# Altium PCB roneMotorBoard-v12_PlayWorks.PcbDoc (part 2 of 2)
Units mil, origin at the board's own origin, x right, y up, seen from the top; angles counter-clockwise.
Board outline 3702 x 3936.38 mil, 2 copper layers (Top Layer, Bottom Layer); 102 components, 86 nets, 373 pads, 235 vias.
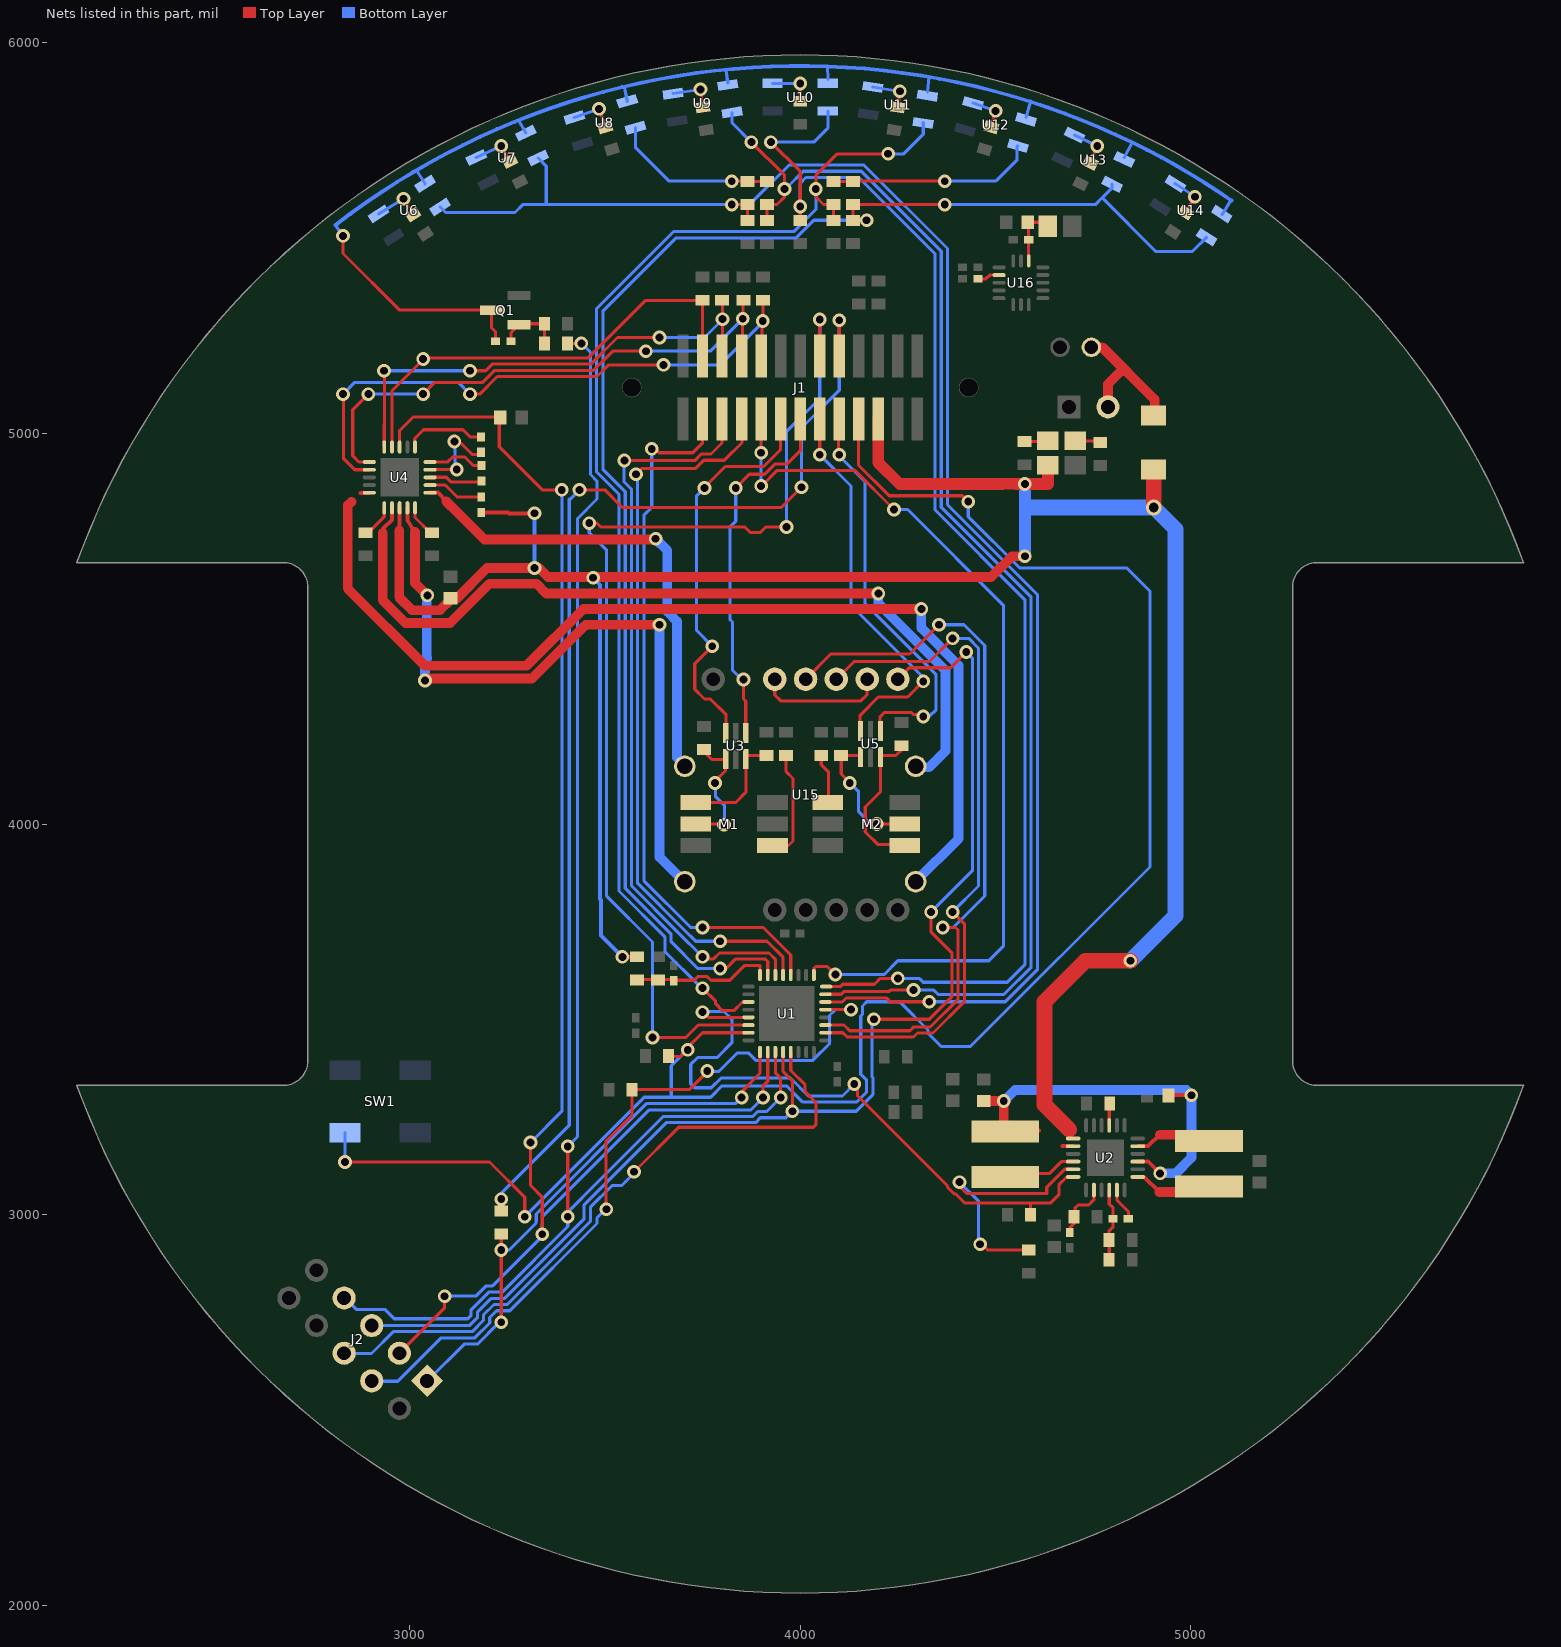
[diagram p2: the nets of this part, all layers, seen from the top]

## Via types
v1: diameter 35, hole 20, Top Layer to Bottom Layer, 109 vias
v2: diameter 35, hole 20, Top Layer to Bottom Layer, tented bottom, 97 vias
v3: diameter 25.98, hole 12.99, Top Layer to Bottom Layer, tented both sides, 9 vias
v4: diameter 35, hole 20, Top Layer to Bottom Layer, tented both sides, 8 vias
v5: diameter 112, hole 96, Top Layer to Bottom Layer, tented bottom, 4 vias
v6: diameter 152, hole 136, Top Layer to Bottom Layer, tented bottom, 4 vias
v7: diameter 175, hole 175, Top Layer to Bottom Layer, tented bottom, 2 vias
v8: diameter 915, hole 915, Top Layer to Bottom Layer, tented bottom, 1 vias
v9: diameter 40, hole 25, Top Layer to Bottom Layer, tented bottom, 1 vias

## Nets (pads, with @x,y where several pads share a name; then routed paths per layer and width w, separated by ;. In a path a pad name is that pad's centre, name@x,y a point inside that pad or via, vN(x,y) a via of type N, cw(c..) or ccw(c..) an arc to the next point about the centre after c; other vN are vias at no path point) (continued)
JTAG_BOTTOM_TEST: J2.6 U1.29 | length 1693.8
  Top Layer w8: v2@3570,3109.5 3574.5,3109.5 3689,3224 4034,3224 4040,3230 4040,3287.44 4012.7,3314.74 4012.7,3332.3 3975.84,3369.16 U1.29@3975.84,3416.57
  Bottom Layer w8: J2.6@2834,2645 2903,2645 2959,2701 3161,2701 3189.7,2729.7 3189.7,2743.76 3216.24,2770.3 3250.3,2770.3 3462.88,2982.88 3462.88,3019 ; 3463,3019 3519,3075 3543.5,3075 v2@3574.5,3106
  other v2: 3574.5,3110
LED_RESET: J1.16 U1.22 | length 2823.7
  Top Layer w8: v1(3460,4770) 3480,4770 3490,4760 3858.42,4760 3872.82,4745.6 3897.18,4745.6 3911.58,4760 v1(3965,4760) ; v2@3622.1,3453.6 3707.5,3453.6 3739.4,3485.5 3786.86,3485.5 ; 3786.89,3485.47 U1.22@3867.57,3485.47 ; J1.16@4050,5197.02 v2(4050,5291)
  Bottom Layer w8: v1(3460,4770) 3460,4745 3504.6,4700.4 3504.6,3815.48 3622,3698.08 v2(3622,3453.5) ; v1@3964.5,4760 3964.5,5003.5 4050,5089 v2(4050,5291)
LINE0: R36.1 R39.1 U1.6 U6.3 U7.3 | length 4158.7
  Top Layer w8: v1@3825,5585.47 R36.1@3865,5585.47 ; R39.1@3865,5544.53 R36.1@3865,5585 ; U1.6@4064.43,3544.53 4107.95,3544.53 4118.42,3555 4220,3555 4230,3545 4312.18,3545
  Bottom Layer w8: U6.3@3078.73,5578.88 3092.61,5565 3270,5565 3290,5585 3350,5585 ; U7.3@3329.23,5704.22 3350,5683.45 3350,5585 ; v1(4330,3545) 4524.97,3545 4606.8,3626.83 4606.8,4587.19 4376.8,4817.19 4376.8,5472.55 4163.15,5686.2 3971.2,5686.2 3870,5585 3350,5585
  other v1: 3825,5585
LINE1: R37.1 R40.1 U1.7 U9.3 | length 3361.6
  Top Layer w8: v1(3875,5745) 3960,5660 v1(3960,5625) 3960,5605 3940.47,5585.47 R37.1@3915,5585.47 R40.1@3915,5545 ; U1.7@4064.43,3564.21 4105.15,3564.21 4111.84,3570.9 4226.59,3570.9 4230.69,3575 v1(4290,3575)
  Bottom Layer w8: U9.3@3825.54,5821.09 3825.54,5794.46 v1(3875,5745) ; v1(3960,5625) 3965,5630 3967.51,5630 4007.81,5670.3 4156.56,5670.3 4360.9,5465.96 4360.9,4810.6 4590.9,4580.6 4590.9,3633.41 4521.59,3564.1 4352.48,3564.1 4341.58,3575 v1(4290,3575)
LINE2: R41.1 U1.8 U10.3 | length 3387.4
  Top Layer w8: v1(3925,5745) 4000,5670 R41.1@4000,5544.53 ; U1.8@4066.53,3583.9 4102.35,3583.9 4108.45,3590 4190,3590 4205,3605 v1(4250,3605)
  Bottom Layer w8: v1(3925,5745) 4035,5745 4070.87,5780.87 U10.3@4070.87,5824.57 ; v1(4000,5580) 4000,5640 4014.4,5654.4 4149.98,5654.4 4345,5459.38 4345,4804.01 4575,4574.01 4575,3640 4530,3595 4315,3595 4305.6,3604.4 4250.6,3604.4 v1(4250,3605) v1@4250,3600
LINE3: R42.1 R47.1 U1.19 U11.3 | length 3225.4
  Top Layer w8: v2(3750,3580) 3783.5,3546.5 3783.5,3539.78 3800.78,3522.5 ; 3801,3522.5 3830.33,3522.5 3852.36,3544.53 U1.19@3867.57,3544.53 ; R42.1@4085,5544.53 R47.1@4085,5585 ; R47.1@4085,5585.47 4059.53,5585.47 4040,5605 4040,5660 4095,5715 v1(4225,5715)
  Bottom Layer w8: v2@3755,3585 3742.51,3585 3653.8,3673.71 3653.8,3711.26 3536.4,3828.66 3536.4,4843.6 3479.1,4900.9 3479.1,5319.1 3675.9,5515.9 3983.41,5515.9 4040,5572.49 v1(4040,5625) ; v1(4225,5715) 4265,5715 4315,5765 U11.3@4315,5795
LINE4: R43.1 R48.1 U1.15 U13.3 U14.3 | length 3903.1
  Top Layer w8: v1(3795,3630) 3810,3630 3834.1,3654.1 3910.9,3654.1 3916.79,3648.21 U1.15@3916.79,3613.43 ; R48.1@4135,5585 v1(4370,5585) ; R48.1@4135,5585.47 4135,5545 v1(4170,5545)
  Bottom Layer w8: v1(3795,3630) 3738.42,3630 3669.7,3698.72 3669.7,3717.84 3552.3,3835.24 3552.3,4850.19 3495,4907.49 3495,5312.51 3682.49,5500 3990,5500 4035,5545 4160,5545 4170,5535 v1(4170,5545) ; v1(4370,5585) 4755,5585 4775,5605 ; U13.3@4798.16,5637.09 4798.16,5628.16 4772.5,5602.5 4910,5465 5003.45,5465 U14.3@5040.14,5501.69
LINE_PWR: C15.1 Q1.3 U6.2 U7.2 U8.2 U9.2 U10.2 U11.2 U12.2 U13.2 U14.2 | length 3395.9
  Top Layer w8: v1@2830,5500 2830,5460 2975,5315 Q1.3@3209.57,5315 3210,5314.57 3210,5270 3220.32,5259.69 C15.1@3220.32,5235
  Bottom Layer w8: 2810.35,5532.43 v1(2830,5505) ; 3020,5670 U6.2@3040.14,5638.31 ; 3280,5800 U7.2@3298.16,5767.91 ; 3550,5885 U8.2@3557.41,5849.6 ; 3810,5930 U9.2@3814.45,5896.08 ; 4070,5940 4070.03,5938.74 U10.2@4070.87,5905.43 ; U11.2@4325.54,5873.91 4330,5910 ; U12.2@4578.13,5808.17 4589.51,5848.26 4590,5850 ; U13.2@4829.23,5705.78 4849.53,5744.11 4850,5745 ; U14.2@5080,5560 5080.15,5560.24 5101.35,5594.16
  Bottom Layer w10: 2810.35,5532.43 cw(c4000,4000) 4070.03,5938.74 cw(c4000,4000) 4589.51,5848.26 cw(c4000,4000) 4849.53,5744.11 cw(c4000,4000) 5103.24,5595.76
LINE_PWR_ENABLE: J2.7 R34.2 U1.27 | length 3841.6
  Top Layer w8: v1(3405,2995) v1(3405,3175) v1@3405,3180 ; R34.2@3405,5230 v1(3440,5230) ; U1.27@3936.47,3416.57 3936.47,3363.53 3950,3350 v2@3950,3315.94
  Bottom Layer w8: J2.7@2837,2785 2864.05,2757.95 2937.05,2757.95 2961,2734 3149,2734 3157.9,2742.9 3157.9,2756.94 3203.06,2802.1 3237.13,2802.1 3405,2969.97 v1(3405,2995) 3405,3006.09 3441.25,3042.34 3441.25,3042.63 ; v1(3405,3175) 3430,3200 3430,4781.58 3480,4831.58 3480,4877.51 3463.2,4894.31 3463.2,5206.8 v1(3440,5230) ; 3441.25,3042.88 3650.17,3251.8 3879.29,3251.8 3891.59,3264.1 3914.1,3264.1 v2(3950,3300) 3953.36,3303.36 v2@3953.36,3313.36
MOT0_CUR: R29.1 U4.15 | length 77.7
  Top Layer w8: U4.15@3014.37,4809.24 3014.37,4784.37 R29.1@3051.74,4747
MOT0_PWMA: J1.4 R25.1 U4.4 | length 1177.2
  Top Layer w8: U4.4@2955.32,4964.76 2955.32,5108.31 3039.7,5192.7 3457.7,5192.7 3605,5340 3750,5340 J1.4@3750,5197.02
  other v2: 3035,5190
MOT0_PWMB: J1.6 R26.1 U4.5 | length 1256.8
  Top Layer w8: U4.5@2935.63,4964.76 2935.63,5023.37 ; 2936,5023 v2@2936,5160 ; v2(3155,5160) 3195.03,5160 3211.83,5176.8 3464.29,5176.8 3532.49,5245 v2(3640,5245) ; J1.6@3801,5197.02 v2(3801,5292) R26.1@3801,5341
  Bottom Layer w8: v2(2935,5160) v2(3155,5160) ; v2(3640,5245) 3755,5245 3796,5286 v2@3796,5290
MOT1_A: M2.M2 U4.10 | length 2638.1
  Top Layer w10: 2874.94,4847.44 U4.10@2896.56,4847.44
  Top Layer w25: 2842,4815 2842,4603 3040,4405 3300,4405 3445,4550 v1(4310,4550) ; 2843,4816 2851.5,4824.5
  Bottom Layer w25: M2.M2@4295.37,3852.36 4405,3961.99 4405,4406.03 4310,4501.03 v1(4310,4550)
MOT1_B: M2.M1 U4.12 | length 2150.8
  Top Layer w10: 2934,4747 2934,4757 2955,4778 U4.12@2955,4808.24
  Top Layer w25: 2931.5,4745 2931.5,4572.67 2989.97,4514.2 3104.2,4514.2 3205,4615 3325,4615 3350,4590 v1(4200,4590)
  Bottom Layer w25: v1(4200,4590) 4200,4564.51 4372.1,4392.41 4372.1,4187.1 4330,4145 M2.M1@4300,4145
MOT1_CUR: R28.1 U4.11 | length 75.8
  Top Layer w8: R28.1@2898.03,4749.03 2935.63,4786.63 U4.11@2935.63,4809.24
MOT1_PWMA: J1.8 R27.1 U4.6 | length 1404.5
  Top Layer w8: v2(2895,5100) 2855,5060 2855,4942 2870.63,4926.37 U4.6@2897.24,4926.37 ; v2(3035,5100) 3065,5130 3187.51,5130 3218.41,5160.9 3470.87,5160.9 3519.97,5210 v1(3605,5210) ; J1.8@3852,5201.02 v2@3852,5292 ; v2@3854,5289 R27.1@3854,5342
  Bottom Layer w8: v2(2895,5100) v2(3035,5100) ; v1(3605,5210) 3770,5210 3847.5,5287.5 v2@3854.5,5287.5
  other v2: 3853,5293
MOT1_PWMB: J1.10 R23.1 U4.7 | length 1564.5
  Top Layer w8: v2@2831,5100 2831,4936 2860.32,4906.69 U4.7@2897.24,4906.69 ; v1(3155,5100) 3180,5100 3225,5145 3480,5145 3510,5175 v2(3650,5175) ; J1.10@3902,5203.02 v2@3902,5284 ; v2@3905,5280 R23.1@3905,5342.47
  Bottom Layer w8: v2(2830,5100) 2860,5130 3125,5130 v1(3155,5100) ; v2(3650,5175) 3795,5175 3903,5283 v2@3903,5288
  other v2: 3904,5287
MOT_0A: M1.M2 U4.16 | length 1244.1
  Top Layer w10: U4.16@3052.07,4847.94 3073.06,4847.94 3094,4827
  Top Layer w25: 3094,4826 3123,4797 ; 3125,4795 3192.1,4727.9 3632.1,4727.9 v1(3630,4730)
  Bottom Layer w25: v1(3630,4730) 3660,4700 3660,4543.6 3685,4518.6 3685,4170 M1.M2@3707.5,4147.5
MOT_0B: M1.M1 U4.14 | length 1812.9
  Top Layer w10: U4.14@2995,4809.56 2995,4777 3014,4747
  Top Layer w25: 3014,4747 3014,4617 v2(3046,4585) ; v1(3040,4367.1) 3045,4372.1 3313.63,4372.1 3451.53,4510 3600,4510 ; 3595,4510 v1(3640,4510)
  Bottom Layer w25: v1(3040,4367.1) 3040,4420 3044.5,4424.5 ; 3044.5,4417.5 3044.5,4424.5 ; v2@3044.5,4576 3044.5,4424.5 ; 3045,4425 3044.5,4424.5 ; v1(3640,4510) 3640,3915 M1.M1@3705,3850
MOT_SLEEP: J2.3 R24.1 U1.26 U4.3 | length 3911.4
  Top Layer w8: J2.3@2974,2646 3090,2762 v2(3090,2791.5) ; U4.3@2975,4964.76 2975,5006.5 ; 2975.5,5007 3010.5,5042 3227.44,5042 3230,5039.44 3230,4965 3340,4855 v1(3390,4855) ; v1(3310,3185) 3310,3075 3340,3045 v1(3340,2950) ; v2(3905,3300) 3905,3330 3916.79,3341.79 U1.26@3916.79,3416.57
  Bottom Layer w8: v2@3090.57,2792.43 3170.91,2792.43 3196.48,2818 3213,2818 3340,2945 v1(3340,2950) 3340,2975.94 3340.3,2976.24 3340.3,2995.3 3612.7,3267.7 3872.7,3267.7 v2(3905,3300) ; v1(3310,3185) 3390,3265 3390,3428.78 3390.05,3428.83 3390.05,3607.86 3390,3607.91 3390,3965.87 3390.05,3965.92 3390.05,4144.95 3390,4145 v1(3390,4855)
NetC6_2: C6.2 R7.2 U2.2 | length 142.7
  Top Layer w8: C6.2@4690,2954.69 4690,2967 4700,2977 R7.2@4700,2994 ; R7.2@4703,3000 4703,3017 4711,3025 4738,3025 4751.47,3038.47 U2.2@4751.47,3063.32
NetC10_1: C10.1 R11.2 R12.1 U2.4 | length 182
  Top Layer w8: R12.1@4790,2941 4790,2958 4800,2968 4800,3019 4791,3027 U2.4@4791,3063.32 ; R11.2@4791,2885.5 R12.1@4791,2937
NetC10_2: C10.2 U2.5 | length 80.5
  Top Layer w8: U2.5@4810.53,3063.32 4810.53,3037.47 4840,3008 C10.2@4840,2995
NetC11_1: C11.1 U4.19 | length 216.6
  Top Layer w8: U4.19@3052.07,4907 v2@3118,4907 ; v2@3114,4975 3131,4975 3160,4946 C11.1@3184.69,4946
  Bottom Layer w8: v2@3117,4908 v2@3117,4976
  other v2: 3121,4907 3115,4979
NetC11_2: C11.2 U4.1 | length 206.7
  Top Layer w8: U4.1@3013.68,4965.07 3013.68,4986.68 3036,5009 3137.25,5009 3156.25,4990 C11.2@3181.69,4990
NetC12_1: C12.1 U4.18 | length 134.1
  Top Layer w8: U4.18@3052.07,4887.31 3094.31,4887.31 3106.63,4875 C12.1@3181.06,4875
NetC12_2: C12.2 U4.20 | length 146.3
  Top Layer w8: U4.20@3052.07,4926.68 3098.43,4926.68 3110.75,4939 3142,4939 3163.69,4917.31 C12.2@3184.31,4917.31
NetC13_2: C13.2 U4.17 | length 144.7
  Top Layer w8: U4.17@3052.07,4867.63 3091.37,4867.63 3122.31,4836.69 C13.2@3184,4836.69
NetC15_2: C15.2 Q1.1 R32.2 R34.1 | length 150.9
  Top Layer w8: C15.2@3260,5235 3260,5257.17 Q1.1@3280.43,5277.6 ; Q1.1@3295,5280 R32.2@3345,5280 ; R32.2@3345.24,5279.76 3345.47,5279.53 R34.1@3345.47,5230
NetC20_2: C20.2 U16.2 | length 57.9
  Top Layer w8: C20.2@4455,5395 4475,5395 4484.69,5404.69 U16.2@4508.9,5404.69
NetD1_2: D1.2 R9.2 | length 50.5
  Top Layer w8: R9.2@4574,4978.53 D1.2@4624.53,4978.53
NetD2_2: D2.2 R13.2 | length 60.5
  Top Layer w8: D2.2@4704,4980.5 R13.2@4764.5,4980.5
NetL1_1: L1.1 U2.22 | length 188
  Top Layer w8: L1.1@4521,3097.75 4529.25,3106 4638.37,3106 4668.37,3136 U2.22@4693.11,3136
NetL2_1: L2.1 U2.7 | length 183.5
  Top Layer w10: U2.7@4863.68,3096.94 4880.06,3096.94 4919,3058
  Top Layer w25: 4919,3058 L2.1@5031.09,3058
NetL2_2: L2.2 U2.11 | length 158.2
  Top Layer w10: U2.11@4863.68,3175.53 4890,3175.53 ; 4890,3176 4920.91,3205 ; L2.2@5039.41,3206 L2.2@5051,3194.41
  Top Layer w25: 4920.91,3205 L2.2@4994,3205
NetM1_A: M1.A R20.1 | length 306.5
  Top Layer w8: M1.A@3906,3945 3970,3945 3981.5,3956.5 3981.5,4116.5 3964,4134 R20.1@3964,4175.47
NetM2_A: M2.A R30.1 | length 126.9
  Top Layer w8: R30.1@4054,4175.47 4054,4152 4072,4134 M2.A@4072,4056
NetR8_1: R8.1 U2.15 | length 56.8
  Top Layer w8: U2.15@4790.84,3228.83 R8.1@4790.84,3285.66
NetR10_2: R10.2 U2.23 | length 647.2
  Top Layer w8: v2(4407.5,3083.5) 4412,3079 4412,3068.5 4426,3054.5 4631,3054.5 4631,3070.5 4676.97,3116.47 U2.23@4698.32,3116.47 ; v2@4460.5,2929 4479.5,2910 R10.2@4585,2910
  Bottom Layer w8: v2(4407.5,3083.5) 4456.5,3034.5 v2@4456.5,2933
  other v2: 4460.5,2924.5
NetR33_1: R33.1 U6.1 | length 133
  Top Layer w8: v1(2985,5600) 3010,5560 R33.1@3005,5570
  Bottom Layer w8: U6.1@2921.27,5561.12 v1(2985,5600)
NetR35_1: R35.1 U7.1 | length 114.9
  Top Layer w8: v1(3235,5735) R35.1@3257.06,5696.54
  Bottom Layer w8: U7.1@3170.77,5705.78 v1(3235,5735)
NetR36_2: R36.2 R37.2 U8.3 | length 417.5
  Top Layer w8: v1(3825,5645) 3864.53,5645 R36.2@3865,5644.53 R37.2@3909.53,5644.53
  Bottom Layer w8: U8.3@3578.13,5781.83 3578.13,5731.87 3665,5645 v1(3825,5645)
NetR38_1: R38.1 U8.1 | length 116.3
  Top Layer w8: v1(3485,5830) R38.1@3501.37,5783.24
  Bottom Layer w8: U8.1@3421.87,5808.17 v1(3485,5830)
NetR44_1: R44.1 U9.1 | length 117.6
  Top Layer w8: v1(3745,5880) R44.1@3750.38,5834.16
  Bottom Layer w8: U9.1@3674.46,5868.91 v1(3745,5880)
NetR45_1: R45.1 U10.1 | length 116.3
  Top Layer w8: R45.1@4000,5849.53 v1(4000,5895)
  Bottom Layer w8: U10.1@3929.13,5895.43 v1(4000,5895)
NetR46_1: R46.1 U11.1 | length 111.5
  Top Layer w8: R46.1@4249.62,5834.16 v1(4255,5875)
  Bottom Layer w8: U11.1@4185.55,5886.08 v1(4255,5875)
NetR47_2: R47.2 R48.2 U12.3 | length 523.7
  Top Layer w8: R47.2@4085,5644.53 R48.2@4129.53,5644.53 ; R48.2@4135,5645 v1(4370,5645)
  Bottom Layer w8: v1(4370,5645) 4500,5645 4555,5700 4555,5732.99 U12.3@4557.41,5735.4
NetR49_1: R49.1 U12.1 | length 103.9
  Top Layer w8: R49.1@4488.63,5783.24 v1(4500,5825)
  Bottom Layer w8: U12.1@4442.59,5844.6 v1(4500,5825)
NetR50_1: R50.1 U13.1 | length 111.2
  Top Layer w8: R50.1@4742.94,5691.54 v1(4760,5735)
  Bottom Layer w8: U13.1@4701.84,5762.91 v1(4760,5735)
NetR51_1: R51.1 U14.1 | length 107
  Top Layer w8: R51.1@4986.08,5564.76 v1(5010,5605)
  Bottom Layer w8: U14.1@4959.86,5638.31 v1(5010,5605)
NetU15_7: U15.7 U15.10 | length 323.5
  Top Layer w8: U15.10@3935,4365 3935,4330 3950,4315 4155,4315 4171.26,4331.26 U15.7@4171.26,4370.55
POWER_BUTTON: J1.19 R2.1 SW1.1 U1.23 | length 4920.3
  Top Layer w8: v1(2835,3135) 3205,3135 3295,3045 v1(3295,2995) ; R2.1@3663.53,3405 3687.5,3405 ; 3686,3405 3695,3405 v2(3712,3422) ; v2@3710,3426 3749.79,3465.79 U1.23@3867.57,3465.79 ; J1.19@4149,4996 4149,4918.49 4227.49,4840 4415,4840 v1(4430,4825)
  Bottom Layer w8: v1@2835,3140 SW1.1@2835,3210 ; v1(3295,2995) 3600.9,3300.9 3770.9,3300.9 3800,3330 3965,3330 4006.8,3288.2 4144.2,3288.2 4170,3314 4170,3344.58 4155,3359.58 4155,3508.42 4159.4,3512.82 4159.4,3534.4 4170,3545 4255,3545 4327.18,3472.82 4327.18,3464.4 4360.98,3430.6 4392.18,3430.6 4392.48,3430.9 4435.9,3430.9 4895,3890 4895,4595.49 4835.49,4655 4561.47,4655 4430,4786.47 v1(4430,4825) ; 3670,3303.75 3670,3381 v2@3710,3421
POWER_EN: R14.2 U1.21 U2.24 | length 1663.8
  Top Layer w8: v2@3757.5,3513 3765.5,3505 U1.21@3867.42,3505 ; v2@4146.5,3334.5 4146.5,3304.5 4377.1,3073.9 ; 4377.1,3070.32 4394.32,3053.1 ; 4397.9,3053.1 4420.5,3030.5 4641.13,3030.5 4662,3051.37 4662,3076.5 4682.29,3096.79 U2.24@4698.32,3096.79 ; R14.2@4589.53,3000 4589.53,3030.47
  Bottom Layer w8: v2@3750,3520 3805,3520 3825,3500 3825,3440 3787.1,3402.1 3737.1,3402.1 3720,3385 3720,3335 3730,3325 3772.51,3325 3797.51,3350 3975,3350 4020.9,3304.1 4108.1,3304.1 v2(4138.5,3334.5) ; v2@4138,3335 v2@4140,3335
  other v2: 3750,3518.5
QEI_0A: J1.11 U3.6 | length 993.8
  Top Layer w8: v2@3755,4861.5 3808.5,4915 3906.58,4915 3950,4958.42 J1.11@3950,5013 ; v2(3775,4455) 3730,4410 3730,4345 3755,4320 3770,4320 3810.41,4279.59 U3.6@3810.41,4241.46
  Bottom Layer w8: v2(3755,4860) 3735,4840 3735,4495 v2(3775,4455)
QEI_0A_ANALOG: M1.E1 R21.2 U3.1 | length 335.5
  Top Layer w8: M1.E1@3708.31,4000 M1.E1@3732.52,4000 v2@3804,4000 ; R21.2@3759,4180 3774,4165 3809,4165 3809,4136 3783,4111 v2@3783,4097
  Bottom Layer w8: v2@3783,4099 3783,4071 3806,4048 v2@3806,4004
  other v2: 3805,3998 3782,4105
QEI_0B: J1.13 U3.4 | length 925.5
  Top Layer w8: v1(3835,4860) 3870,4895 3909.06,4895 3934.96,4920.9 3965.9,4920.9 4001,4956 J1.13@4001,5031 ; v1(3855,4370) 3855,4320 3860.59,4314.41 U3.4@3860.59,4242.46 ; U3.4@3860,4243.06 U3.4@3860.59,4242.46 ; U3.4@3860.59,4238.46 U3.4@3860.59,4242.46 ; U3.4@3861.59,4241.46 U3.4@3860.59,4242.46
  Bottom Layer w8: v1(3835,4860) 3835,4775 3820,4760 3820,4523.9 3826.9,4517 3826.9,4393.1 v1@3850,4370
QEI_0B_ANALOG: M1.E2 R19.1 U3.3 | length 318.9
  Top Layer w8: M1.E2@3710,4055 3835,4055 3861,4081 U3.3@3861,4186.13 ; U3.3@3862,4175.47 R19.1@3914,4175.47
QEI_1A: J1.15 U5.6 | length 1012.1
  Top Layer w8: v2(4050,4945) J1.15@4050,5036.98 ; U5.6@4153.41,4238.46 4153.41,4278.41 4200,4325 4275,4325 v1(4315,4365)
  Bottom Layer w8: v2(4050,4945) 4130,4865 4130,4560 4310,4380 v1@4310,4370
QEI_1A_ANALOG: M2.E1 R31.2 U5.1 | length 354.2
  Top Layer w8: R31.2@4104,4175.47 U5.1@4152.53,4175.47 ; R31.2@4105,4173 4105,4128 v2@4126,4107 ; v2@4207,4000 M2.E1@4267.48,4000 M2.E1@4285,4000
  Bottom Layer w8: v2(4127,4105) 4149.41,4082.59 4149.41,4031.59 4180,4001 v2@4207,4001
  other v2: 4196,4000
QEI_1B: J1.17 U5.4 | length 1012.1
  Top Layer w8: v2@4098,4951 J1.17@4098,5038 ; U5.4@4204.59,4238.46 4204.59,4274.59 4215.21,4285.21 4284.79,4285.21 4290,4280 v1@4315,4280
  Bottom Layer w8: v2@4102.58,4939 4166,4875.58 4166,4564 4347.7,4382.3 4347.7,4292.7 v1@4330.6,4275.6
  other v1: 4315,4275
  other v2: 4100,4945
QEI_1B_ANALOG: M2.E2 R22.2 U5.3 | length 422.4
  Top Layer w8: U5.3@4205,4182.13 U5.3@4205,4175.47 ; R22.2@4262,4193 4244.47,4175.47 U5.3@4205,4175.47 ; M2.E2@4293,3948 4198,3948 4166.5,3979.5 4166.5,4043.5 4205,4082 U5.3@4205,4175.47
RESET: J1.18 R5.2 | length 3102.8
  Top Layer w8: R5.2@3235,3009.53 v1(3235,3040) ; v1(3435,4855) 3500,4855 3545,4810 3951.51,4810 v1(4003.26,4861.74) ; J1.18@4100,5197.02 v2(4100,5289)
  Bottom Layer w8: v1(3235,3040) 3235,3055 3409.1,3229.1 3409.1,4830.9 3410,4830 v1(3435,4855) ; v1@4003.26,4856.74 v1(4003.26,4861.74) 4003.26,5013.26 4100,5110 v2(4100,5289)
RESET_1: J2.1 R5.1 U1.25 | length 1372
  Top Layer w8: v1@3235,2730 v1@3235,2900 ; v1(3235,2910) R5.1@3235,2945 ; v2(3850,3300) 3850,3315 3897.1,3362.1 U1.25@3897.1,3416.57
  Bottom Layer w8: J2.1@3047,2576 3140,2669 3174,2669 v1@3227.5,2722.5 ; v1(3235,2910) 3255,2910 3324.1,2979.1 3324.1,2982.52 3324.4,2982.82 3324.4,3001.89 3607.51,3285 3835,3285 v2(3850,3300)
  other v1: 3235,2725
RESET_430: J2.4 R1.1 U1.5 | length 1893.2
  Top Layer w8: v2@3503,3017 3503,3188 3570,3255 R1.1@3570,3320 ; R1.1@3570,3321 3717,3321 v2@3762,3366 ; U1.5@4064.43,3524.84 4117.62,3524.84 v1@4122.46,3520
  Bottom Layer w8: J2.4@2903.58,2568.58 2909,2574 2970,2574 3081,2685 3167.51,2685 3205.6,2723.09 3205.6,2737.18 3222.82,2754.4 3256.89,2754.4 3480,2977.51 3480,2992 v2@3503,3015 ; v2@3763.5,3366.5 3791.5,3366.5 3839.4,3414.4 3867.18,3414.4 3886.58,3395 4032.49,3395 4075,3437.51 4075,3510 4090,3525 v1(4130,3525)
  other v2: 3504,3014 3762,3368
RFID_CLK: U1.2 U15.8 | length 1759.9
  Top Layer w8: U1.2@4064.43,3465.79 4109.21,3465.79 4120,3455 4290,3455 4300,3465 4340,3465 4420,3545 4420,3745 v1(4390,3775) ; U15.8@4092.52,4370.55 4137.87,4415.9 4330.9,4415.9 v1(4390,4475)
  Bottom Layer w8: v1(4390,3775) 4456.4,3841.4 4456.4,4450.18 4431.58,4475 v1(4390,4475)
RFID_DATA: U1.3 U15.9 | length 1917.9
  Top Layer w8: U15.9@4013.78,4370.55 4078.23,4435 4280,4435 v1(4355,4510) ; U1.3@4064.43,3485.47 4112.01,3485.47 4126.59,3470.9 4280.9,3470.9 4290.9,3480.9 4333.41,3480.9 4404.1,3551.59 4404.1,3728.39 4397.49,3735 v1(4365,3735)
  Bottom Layer w8: v1(4355,4510) 4419.06,4510 4472.3,4456.76 4472.3,3815.72 4391.58,3735 v1(4365,3735)
RFID_TAG: J2.5 U1.28 U15.6 | length 3296.3
  Top Layer w8: U1.28@3956.16,3416.57 3956.16,3366.36 3980,3342.51 v2(3980,3265) ; v1(4188.46,3500.3) 4330.33,3500.3 4388.2,3558.17 4388.2,3670.22 4335,3723.42 v1(4335,3775) ; U15.6@4250,4370.55 4279.45,4400 4385,4400 v1(4425,4440)
  Bottom Layer w8: J2.5@2904,2717 3154.51,2717 3173.8,2736.29 3173.8,2750.35 3209.65,2786.2 3243.71,2786.2 3446.98,2989.47 3446.98,3025.59 3456.3,3034.9 3456.41,3034.9 3457.25,3035.74 3457.25,3036 ; 3457.25,3036.25 3656.9,3235.9 3885.87,3235.9 3898.17,3248.2 3963.2,3248.2 v2(3980,3265) 4143.49,3265 4185.9,3307.41 4185.9,3351.16 4183.8,3353.26 4183.8,3498.8 4185.3,3500.3 v1(4188.46,3500.3) ; v1(4335,3775) 4440.5,3880.5 4440.5,4424.5 v1(4425,4440)
SPI_CLK: J1.9 U1.9 | length 2344
  Top Layer w8: v1(3900,4865) 3901.55,4865 3941.55,4905 4140,4905 v1(4240,4805) ; v1(3900,4950) J1.9@3900,5015 ; U1.9@4034.9,3613.43 4034.9,3629.9 4040,3635 4070,3635 v1(4090,3615)
  Bottom Layer w8: v1(3900,4865) v1(3900,4950) ; v1(4090,3615) 4215,3615 4250,3650 4482.54,3650 4520,3687.46 4520,4560 4275,4805 v1(4240,4805)
SPI_MISO: J1.5 U1.14 | length 1916.2
  Top Layer w8: v1@3553.2,4930 3730,4930 3746.8,4946.8 3771.8,4946.8 3800,4975 J1.5@3800,5034.98 ; v1(3750,3660) 3755,3655 3778.42,3655 3793.42,3670 3920,3670 3936.47,3653.53 U1.14@3936.47,3613.43
  Bottom Layer w8: v1@3549.1,4925.9 3549.1,4875.87 3568.2,4856.77 3568.2,3841.83 3685.6,3724.43 ; 3685.6,3724.4 v1(3750,3660)
  other v1: 3550,4930
SPI_MOSI: J1.7 U1.13 | length 1908.8
  Top Layer w8: v1(3580,4895) 3595,4910 3732.49,4910 3753.39,4930.9 3805.9,4930.9 3851,4976 J1.7@3851,5035.98 ; v1(3795,3700) 3915,3700 3956.16,3658.84 U1.13@3956.16,3613.43
  Bottom Layer w8: v1(3580,4895) 3584.1,4890.9 3584.1,3848.41 3701.5,3731.01 3732.49,3700 v1(3795,3700)
SPI_SEL_MSP430: J1.3 U1.12 | length 1830.9
  Top Layer w8: v1(3620,4960) 3620,4969 3639,4950 3725,4950 3749.5,4974.5 J1.3@3749.5,5029.48 ; v1(3750,3735) 3905,3735 3975,3665 3975.84,3665 U1.12@3975.84,3613.43
  Bottom Layer w8: v1(3620,4960) 3620,4810 3600,4790 3600,3855 3720,3735 v1(3750,3735)
VBAT: C13.1 C14.2 D1.1 F1.1 J1.21 R15.2 U2.19 U4.13 | length 6284.5
  Top Layer w10: 2975,4750 U4.13@2975,4809.24 ; C13.1@3184,4797.31 3252.69,4797.31 3255,4795 v2(3320,4795) ; v1(3545,3660) R15.2@3575,3660
  Top Layer w25: 2974,4751.5 2974,4580 3006.9,4547.1 3078.6,4547.1 C14.2@3104.5,4573 ; C14.2@3105,4575 3118.47,4575 3198.47,4655 v1(3320,4655) 3331.53,4655 3354.43,4632.1 4488.63,4632.1 4541.53,4685 v1(4575,4685)
  Top Layer w30: J1.21@4200,5036.98 4200,4925 4255,4870 4517.87,4870 4518.27,4870.4 4551.73,4870.4 4552.13,4870 v2(4575,4870) 4634,4870 D1.1@4634,4914
  Top Layer w40: 4688.5,3218 4625,3281.5 4625,3545 4730,3650 v2(4845,3650) ; v9(4905,4810) F1.1@4905,4905.5
  Bottom Layer w10: v1(3320,4655) v2(3320,4795) ; v2(3470,4630) 3487.7,4612.3 3487.7,3808.48 3490,3806.18 3490,3715 v1(3545,3660)
  Bottom Layer w30: v2(4575,4870) 4575.4,4869.6 v1@4575.4,4685
  Bottom Layer w40: 4590,4810 v9(4905,4810) 4960.4,4754.6 4960.4,3765.4 v2(4845,3650)
"VBAT +300": C4.2 C8.1 L1.2 U2.9 U2.20 | length 1069.5
  Top Layer w10: L1.2@4581,3215.69 L1.2@4611.31,3215.69 ; 4671,3176 U2.20@4698.32,3176 ; U2.9@4863.68,3136.32 4890.68,3136.32 v2(4921,3106) ; C8.1@4942.56,3315 4951.56,3306 v2(5001,3306)
  Top Layer w25: C4.2@4469.5,3290.94 4521,3290.94 L1.2@4521,3214.25
  Bottom Layer w25: v2@4522.5,3292 4550,3319.5 4988.5,3319.5 v2@5001,3307 ; v2(4921,3106) 4961,3106 5001,3146 v2(5001,3306)
  other v2: 4521,3291
VBAT_IN: F1.2 J3.1 J4.2 | length 375.7
  Top Layer w25: J3.1@4747,5220 4773,5220 4907,5086 F1.2@4907,5034.5 ; J4.2@4787.5,5067.5 4787.5,5126 4823,5161.5
VBAT_SENSE: C3.2 R15.1 R17.2 U1.16 | length 357.4
  Top Layer w8: R15.1@3594.44,3602 C3.2@3681.5,3602 ; C3.2@3675,3600 3728.42,3600 3737.82,3609.4 3762.18,3609.4 3771.58,3600 3820,3600 3858.2,3638.2 3896.8,3638.2 3897.1,3637.9 U1.16@3897.1,3613.43
VDDA: C17.2 C18.2 L3.1 U16.14 | length 136
  Top Layer w8: C18.2@4582.56,5540 L3.1@4620,5540 ; U16.14@4584.69,5441.1 C18.2@4584.69,5539.69
pads on no net: J1.c1 J1.c2 J2.10 M1.NC M2.NC SW1.3 SW1.4 U1.4 U1.17 U1.20 U1.31 U2.18 U4.8 U4.9 U15.3 U15.4 U15.5 U16.3 U16.8 U16.9 U16.11 U16.13 U16.15 U16.16
copper on no net: | length 14567.9
  Top Layer w10: 2676,3331 ccw(c2676,3394) 2739,3394 ; 2677,3331 2149,3331 ccw(c4000,4000) 5851,3331.01 5323,3331 cw(c5323,3394) 5260,3394 5260,4606 cw(c5323,4606) 5323,4669 5851,4669 ccw(c4000,4000) 2149,4669 2677,4669 cw(c2677,4606) 2740,4606 2740,3394
  other v5: 2907,3646 5093,3646 2907,4354 5093,4354
  other v6: 3255,3492 4745,3492 3255,4508 4745,4508
  other v7: 3550,2740 4450,2740
  other v8: 4000,2740

## Polygon pours and split planes (outlines as drawn)
GND on Bottom Layer "MotorGnd" (solid, pour order 6): 2978.77,5072.09 2979.65,5073 3321,5073 3321,4701.39 3141.95,4516.5 2770,4515 2770,4990 2850,5070
GND on Bottom Layer "Bottom Layer-GND" (solid, pour order 4): 4252,3400 4258,3394 4586.5,3394 4625,3394 4664.5,3354.5 4666.5,3352.5 5234,3352.5 5234,3020.5 5221.5,3008 4984,2770.5 4567.5,2770.5 4567.5,2884.5 4347,3105 4229.5,3222.5 4229.5,3342 4229.5,3394 4233.5,3398 4266.5,3398
GND on Bottom Layer "MotorGnd" (solid, pour order 5): 4860,5525 4860,5255 4775,5170 4395,5170 4395,5570 4815,5570

## Keep-outs
Keep-Out Layer:
  circle w5: c4745,4508.5 r120
  circle w5: c3255,3492 r120
Mechanical 1:
  circle w5: c3255,3492 r135
  circle w5: c4745,4508 r135

## Other copper
Top Layer:
  region net VBAT: 2986.5,4746.5 2986.5,4751 2980,4775 2970,4775 2961.5,4751.5 2961.5,4746.5
  region net MOT1_B: 2946,4747 2958.5,4775 2949,4779 2922,4753 2922,4747
  region net MOT_0B: 3002,4748 2990,4776.5 2999,4780 3026,4754 3026,4748
  region net MOT_0A: 3086,4818 3081,4822 3070,4843 3070,4853 3078,4853 3103,4836
  region net MOT1_A: 2862,4818 2867,4822 2878,4843 2878,4853 2870,4853 2845,4836
  region net 5VUSB: 4689.32,3156 4643,3168 4626,3168 4626,3144 4644,3144
  region net 3.3V: 4884,3156 4916.66,3168 4925.66,3168 4925.66,3144 4919,3144
  region net VBAT: 4679.5,3195 4716,3195 4716,3219 4699,3235.5 4679.5,3216.51
  region net NetL2_2: 4889,3180 4913,3215 4935,3216 4933,3192 4890,3171
  region net "VBAT +300": 4885,3134 4909,3099 4931,3098 4929,3122 4891,3141
  region net NetL2_1: 4877,3093 4910,3049 4920,3050 4918,3070 4883,3100
  region net NetL1_1: 4670,3133 4667,3140 4642,3125 4608.5,3125 4607.5,3103 4639,3103
  region net "VBAT +300": 4673,3181 4622,3221 4596.5,3221 4596.5,3185 4643,3185 4668,3172
  region net MOT0_CUR: 3040,4753 3011,4783 3018,4787 3075,4759 3047,4756
  region net MOT1_CUR: 2905,4751 2939,4785 2932,4789 2871,4759

## Silkscreen, mask and mechanical layers (free items; w line width, h text height)
Top Overlay:
  circle w10: c4410,3625.5 r50
  circle w10: c3463,3630 r50
  text "gnd" at 2965,5460 h40
  text "Motor" at 3135,5093 h40
  text "Driver" at 3053,5032 h40
  text "+" at 3449.5,3606.5 h40
  text "+" at 4395,3600.5 h40
Bottom Overlay:
  drawing of 18 lines, arcs and shapes, not listed
  text "SDA" at 4170,5420 h40
  text "SCL" at 4385,5420 h40
  text "gnd" at 3935,5390 h40
  text "lineEn" at 3450,5265 h40
  text "p0A" at 3080,5220 h40
  text "gnd" at 4622,5212 h40
  text "rawbat" at 5010,5205 h40
  text "p0B" at 3295,5145 h40
  text "p1B" at 3290,5075 h40
  text "3.3v" at 4964.5,5045.5 h40
  text "p1A" at 3080,5030 h40
  text "430sel" at 3640,4990 h40
  text "e1A" at 4030,4975 h40 r270
  text "e1B" at 4090,4975 h40 r270
  text "charge pump" at 3080,4970 h40
  text "5vB" at 4300,4970 h40
  text "e0A" at 3740,4890 h40 r270
  text "e0B" at 3825,4890 h40 r270
  text "powBut" at 4435,4865 h40
  text "vBat" at 5075,4795 h40
  text "r-one-v12.2 TileTrack" at 4685,4585 h70
  text "m1B" at 4457,4134.5 h40
  text "m0A" at 3648,4128.5 h40
  text "m0B" at 3653,3836 h40
  text "m1A" at 4463,3831 h40
  text "chg" at 4985,3405 h40
  text "pEn" at 4255,3290 h40
  text "vBat300" at 5299,3273.5 h40
  text "LDO" at 4140,3215 h40
  text "gnd" at 2891.5,2938 h40 r40
  text "tdi" at 2957.5,2874 h40 r40
  text "tdo" at 3028,2805.5 h40 r40
  text "tms" at 3101,2741.5 h40 r40
  text "tck" at 3172.5,2664 h40 r40
  text "tes" at 2817.5,2602 h40 r40
  text "rst" at 2883.5,2530.5 h40 r40
  text "ldo" at 3050.5,2463 h40 r40
Mechanical 1:
  circle w5: c3255,4508 r120
  circle w5: c3255,4508 r135
  circle w5: c4745,3492 r120
  circle w5: c4745,3492 r135
  circle w1: c4000,4000 r1550
  lines w3: 2059,4000 5896,4000 ; 4000,2000 4000,6000

## Text inside footprints (layer, text, board x,y; h text height)
J2: Top Overlay "2" at 3054,2451 h40 r135; Top Overlay "1" at 3115.71,2532.57 h40 r135; Top Overlay "9" at 2733.87,2914.41 h40 r135; Top Overlay "10" at 2663.16,2843.7 h40 r135